# EAGLE board Main (EAGLE 5.10)
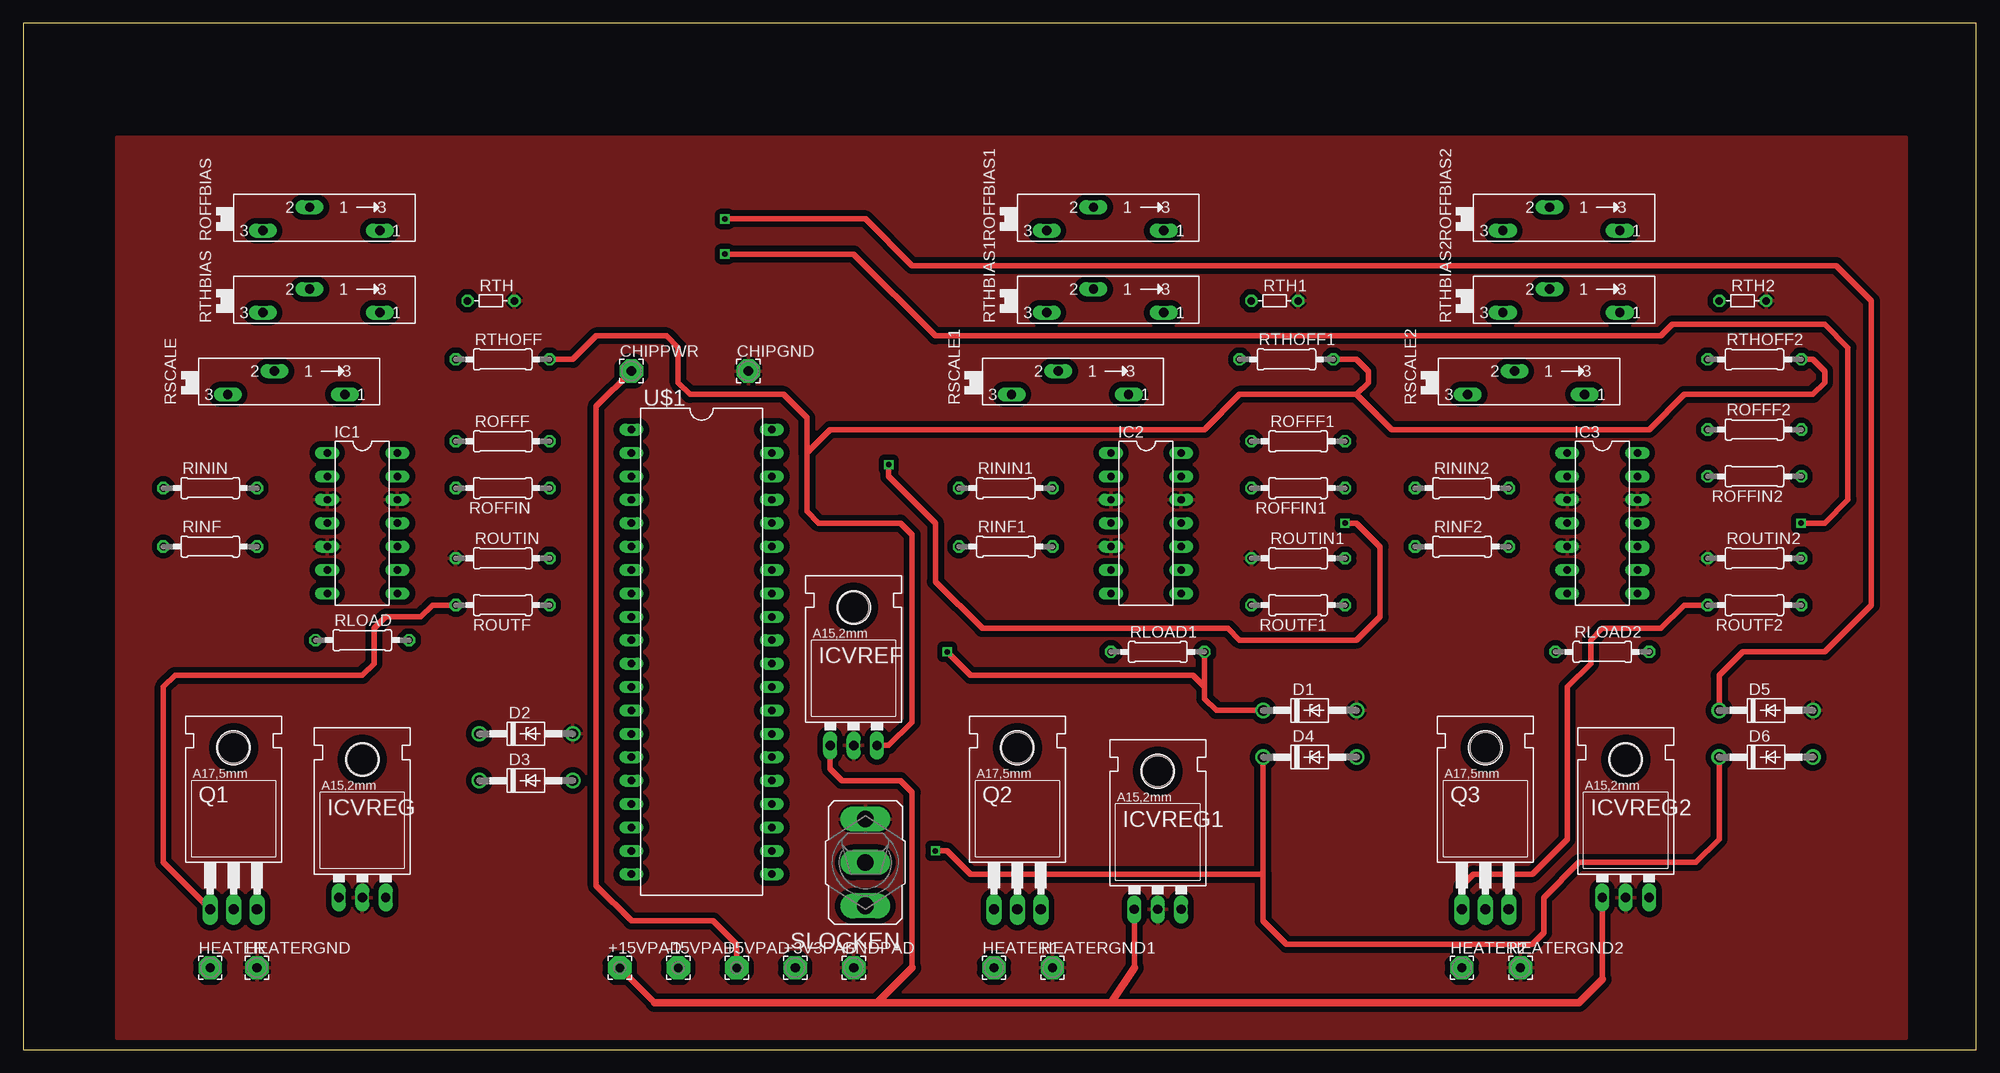
[diagram p0: board, top side]
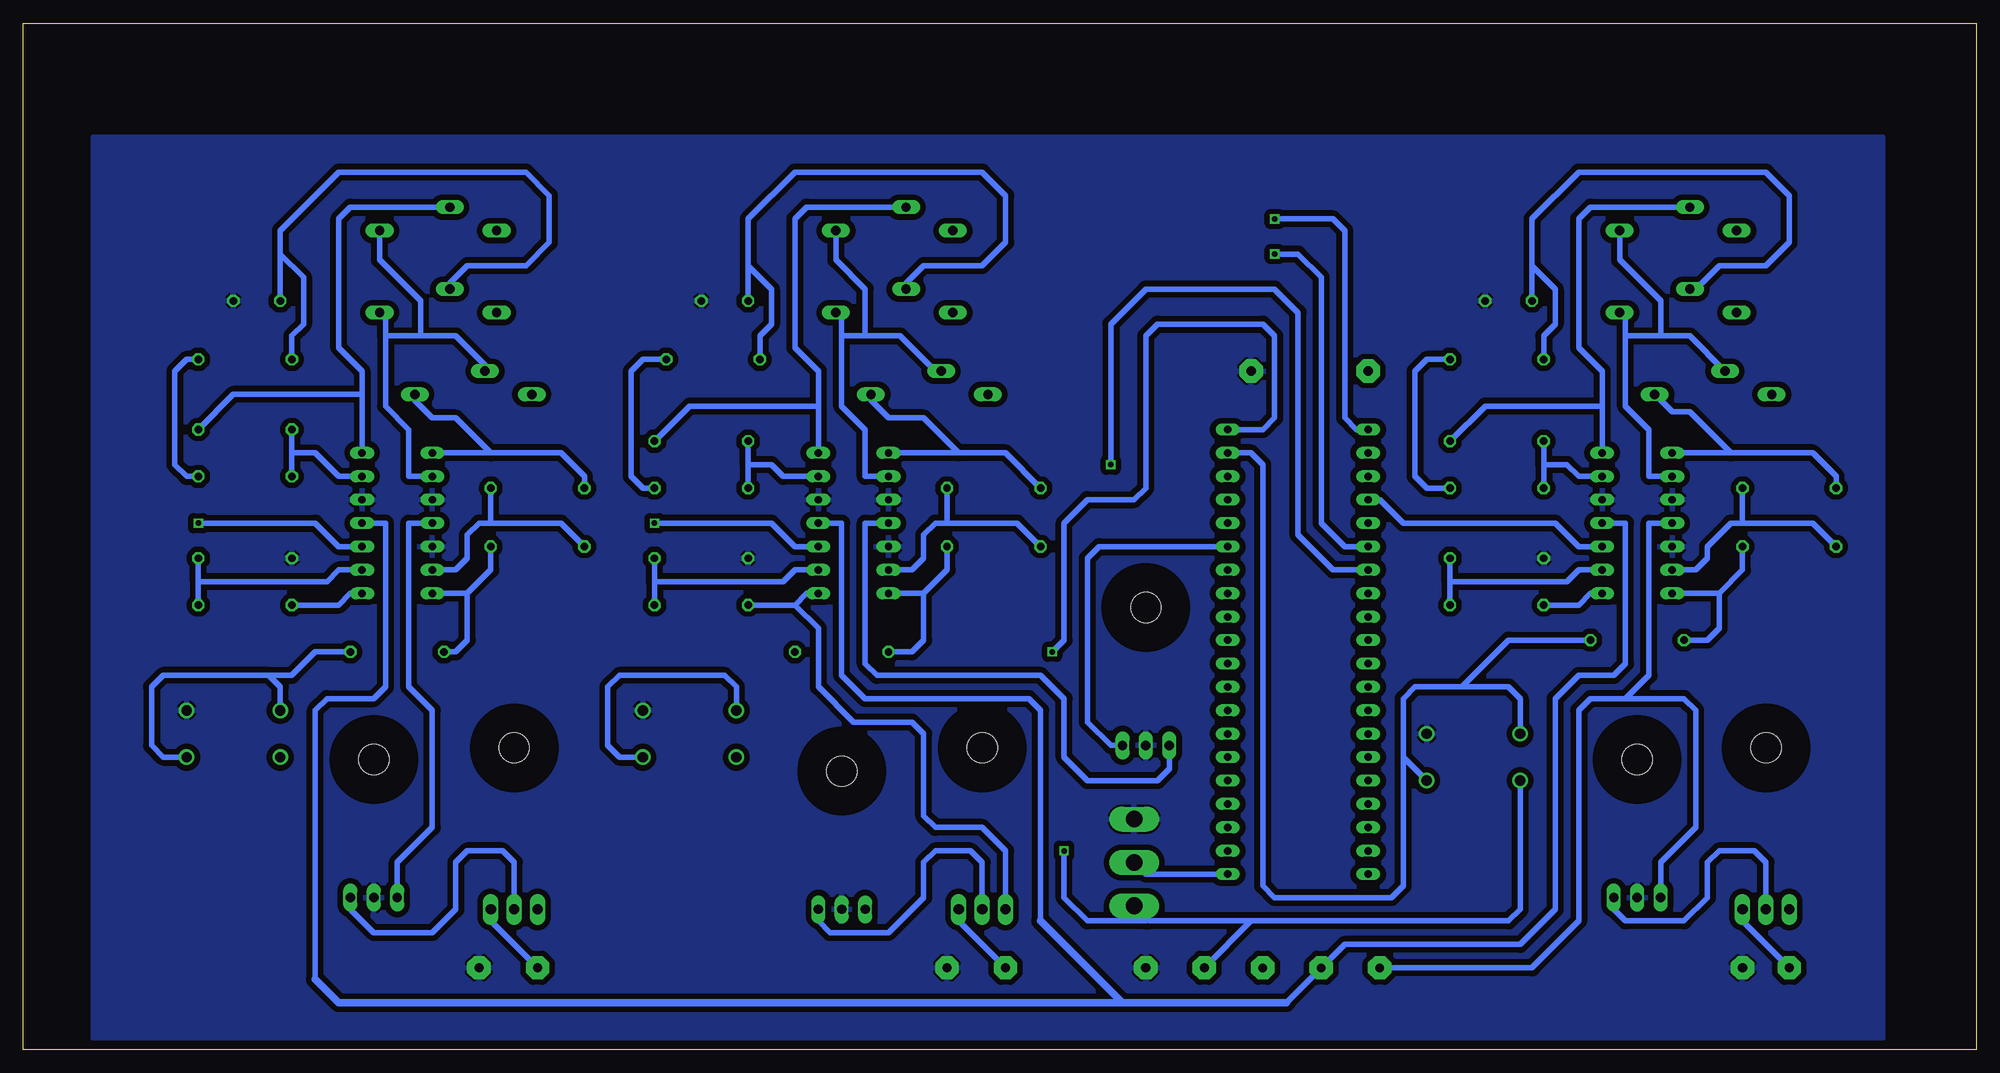
[diagram p1: board, bottom side, seen from below]

Size 212.07 x 111.43 mm. Coordinates in mm from the lower left corner, seen from the top.
Outline: 0,0 212.07,0 212.07,111.43 0,111.43 0,0
Copper layers (1*16): Top 0.035mm / dielectric 1.5mm / Bottom 0.035mm
Design rules "default *": minimum track width 10mil, minimum drill 24mil, track to track 8mil, track to pad 8mil, pad to pad 8mil, via to via 8mil, smd to smd 8mil, copper to edge 40mil, drill to drill 8mil, minimum pad ring 10mil, minimum via ring 8mil, stop-mask expansion 4mil, vias tented up to drill 0mil, thermal gap 10mil

## Footprints (pad centres in the part's own frame; a part is rotated, then mirrored left to right if it is on the bottom)
2,54/1,0 = drill 1.016 pad 2.54 octagon: 1 0,0
2,54/0,9 = drill 0.914 pad 2.54 octagon: 1 0,0
DO41Z10 = drill 1.118 round: A 5.08,0; C -5.08,0
DIL14 = drill 0.813 long: 1 -7.62,-3.81; 2 -5.08,-3.81; 3 -2.54,-3.81; 4 0,-3.81; 5 2.54,-3.81; 6 5.08,-3.81; 7 7.62,-3.81; 8 7.62,3.81; 9 5.08,3.81; 10 2.54,3.81; 11 0,3.81; 12 -2.54,3.81; 13 -5.08,3.81; 14 -7.62,3.81
78XXL = drill 1.016 long: GND 0,-3.81; IN -2.54,-3.81; OUT 2.54,-3.81 | hole 3.302: 0,11.176
TO220BH = drill 1.118 long: D 0,-6.35; G -2.54,-6.35; S 2.54,-6.35 | hole 3.302: 0,11.176
0207/10 = drill 0.813 octagon: 1 -5.08,0; 2 5.08,0
SP19L = drill 1.016 long: A 5.715,-1.27; E -6.985,-1.27; S -1.905,1.27
R-5 = drill 0.813 octagon: 1 -2.54,0; 2 2.54,0
M9040P = drill 1.803 long: 1 0,4.699; 2 0,0; 3 0,-4.699
DIL40 = drill 0.813 long: 1 -22.86,-8.89; 2 -20.32,-8.89; 3 -17.78,-8.89; 4 -15.24,-8.89; 5 -12.7,-8.89; 6 -10.16,-8.89; 7 -7.62,-8.89; 8 -5.08,-8.89; 9 -2.54,-8.89; 10 0,-8.89; 11 2.54,-8.89; 12 5.08,-8.89; 13 7.62,-8.89; 14 10.16,-8.89; 15 12.7,-8.89; 16 15.24,-8.89; 17 17.78,-8.89; 18 20.32,-8.89; 19 22.86,-8.89; 20 25.4,-8.89; 21 25.4,6.35; 22 22.86,6.35; 23 20.32,6.35; 24 17.78,6.35; 25 15.24,6.35; 26 12.7,6.35; 27 10.16,6.35; 28 7.62,6.35; 29 5.08,6.35; 30 2.54,6.35; 31 0,6.35; 32 -2.54,6.35; 33 -5.08,6.35; 34 -7.62,6.35; 35 -10.16,6.35; 36 -12.7,6.35; 37 -15.24,6.35; 38 -17.78,6.35; 39 -20.32,6.35; 40 -22.86,6.35

## Placement (x,y rotation side)
+3V3PAD  [2,54/1,0]  83.82,8.89 0 top
+5VPAD  [2,54/0,9]  77.47,8.89 0 top
+15VPAD  [2,54/0,9]  64.77,8.89 0 top
-15VPAD  [2,54/0,9]  71.12,8.89 0 top
CHIPGND  [2,54/1,0]  78.74,73.66 0 top
CHIPPWR  [2,54/1,0]  66.04,73.66 0 top
D1  1N4728  [DO41Z10]  139.7,36.83 0 top
D2  1N4728  [DO41Z10]  54.61,34.29 0 top
D3  1N4728  [DO41Z10]  54.61,29.21 0 top
D4  1N4728  [DO41Z10]  139.7,31.75 0 top
D5  1N4728  [DO41Z10]  189.23,36.83 0 top
D6  1N4728  [DO41Z10]  189.23,31.75 0 top
GNDPAD  [2,54/1,0]  90.17,8.89 0 top
HEATER  [2,54/1,0]  20.32,8.89 0 top
HEATER1  [2,54/1,0]  105.41,8.89 0 top
HEATER2  [2,54/1,0]  156.21,8.89 0 top
HEATERGND  [2,54/1,0]  25.4,8.89 0 top
HEATERGND1  [2,54/1,0]  111.76,8.89 0 top
HEATERGND2  [2,54/1,0]  162.56,8.89 0 top
IC1  LF347N  [DIL14]  36.83,57.15 270 top
IC2  LF347N  [DIL14]  121.92,57.15 270 top
IC3  LF347N  [DIL14]  171.45,57.15 270 top
ICVREF  [78XXL]  90.17,36.83 0 top
ICVREG  [78XXL]  36.83,20.32 0 top
ICVREG1  [78XXL]  123.19,19.05 0 top
ICVREG2  [78XXL]  173.99,20.32 0 top
Q1  IRFI540NPBF  [TO220BH]  22.86,21.59 0 top
Q2  IRFI540NPBF  [TO220BH]  107.95,21.59 0 top
Q3  IRFI540NPBF  [TO220BH]  158.75,21.59 0 top
RINF  [0207/10]  20.32,54.61 0 top
RINF1  [0207/10]  106.68,54.61 0 top
RINF2  [0207/10]  156.21,54.61 0 top
RININ  [0207/10]  20.32,60.96 0 top
RININ1  [0207/10]  106.68,60.96 0 top
RININ2  [0207/10]  156.21,60.96 0 top
RLOAD  [0207/10]  36.83,44.45 0 top
RLOAD1  [0207/10]  123.19,43.18 0 top
RLOAD2  [0207/10]  171.45,43.18 0 top
ROFFBIAS  [SP19L]  33.02,90.17 0 top
ROFFBIAS1  [SP19L]  118.11,90.17 0 top
ROFFBIAS2  [SP19L]  167.64,90.17 0 top
ROFFF  [0207/10]  52.07,66.04 0 top
ROFFF1  [0207/10]  138.43,66.04 0 top
ROFFF2  [0207/10]  187.96,67.31 0 top
ROFFIN  [0207/10]  52.07,60.96 180 top
ROFFIN1  [0207/10]  138.43,60.96 180 top
ROFFIN2  [0207/10]  187.96,62.23 180 top
ROUTF  [0207/10]  52.07,48.26 180 top
ROUTF1  [0207/10]  138.43,48.26 180 top
ROUTF2  [0207/10]  187.96,48.26 180 top
ROUTIN  [0207/10]  52.07,53.34 0 top
ROUTIN1  [0207/10]  138.43,53.34 0 top
ROUTIN2  [0207/10]  187.96,53.34 0 top
RSCALE  [SP19L]  29.21,72.39 0 top
RSCALE1  [SP19L]  114.3,72.39 0 top
RSCALE2  [SP19L]  163.83,72.39 0 top
RTH  THERMISTOR-5  [R-5]  50.8,81.28 0 top
RTH1  THERMISTOR-5  [R-5]  135.89,81.28 0 top
RTH2  THERMISTOR-5  [R-5]  186.69,81.28 0 top
RTHBIAS  [SP19L]  33.02,81.28 0 top
RTHBIAS1  [SP19L]  118.11,81.28 0 top
RTHBIAS2  [SP19L]  167.64,81.28 0 top
RTHOFF  [0207/10]  52.07,74.93 0 top
RTHOFF1  [0207/10]  137.16,74.93 0 top
RTHOFF2  [0207/10]  187.96,74.93 0 top
SLOCKEN  [M9040P]  91.44,20.32 180 top
U$1  ADUC7020  [DIL40]  74.93,44.45 270 top

## Library data of the parts
+3V3PAD +5VPAD +15VPAD -15VPAD CHIPGND CHIPPWR GNDPAD HEATER HEATER1 HEATER2 HEATERGND HEATERGND1 HEATERGND2 = wirepad
D1-D6 = diode
IC1-IC3 = linear
ICVREF ICVREG ICVREG1 ICVREG2 = v-reg
Q1-Q3 = transistor-power
RINF RINF1 RINF2 RININ RININ1 RININ2 RLOAD RLOAD1 RLOAD2 ROFFF ROFFF1 ROFFF2 ROFFIN ROFFIN1 ROFFIN2 ROUTF ROUTF1 ROUTF2 ROUTIN ROUTIN1 ROUTIN2 RTHOFF RTHOFF1 RTHOFF2 = resistor
ROFFBIAS ROFFBIAS1 ROFFBIAS2 RSCALE RSCALE1 RSCALE2 RTHBIAS RTHBIAS1 RTHBIAS2 = pot
RTH RTH1 RTH2 = varistor
SLOCKEN = switch
U$1 = John

## Nets
+3V3: +3V3PAD.1 D3.C D4.C D6.C SLOCKEN.1
+5V: +5VPAD.1 CHIPPWR.1
+15V: +15VPAD.1 IC1.4 IC2.4 IC3.4 ICVREF.IN ICVREG1.IN ICVREG2.IN ICVREG.IN
-15V: -15VPAD.1 IC1.11 IC2.11 IC3.11
AGND1: U$1.36
AVDD1: U$1.37
DGND1: U$1.17
GND: CHIPGND.1 D1.A D2.A D5.A GNDPAD.1 HEATERGND1.1 HEATERGND2.1 HEATERGND.1 IC1.3 IC1.5 IC1.12 IC2.3 IC2.5 IC2.12 IC3.3 IC3.5 IC3.12 ICVREF.GND ICVREG1.GND ICVREG2.GND ICVREG.GND ROUTIN1.1 ROUTIN2.1 ROUTIN.1 RTH1.2 RTH2.2 RTH.2 SLOCKEN.3
IOGND1: U$1.14
IOVDD1: U$1.15
N$1: IC1.6 RINF.1 RININ.2
N$2: D2.C D3.A RLOAD.2 U$1.39
N$3: IC1.1 RININ.1 RSCALE.A
N$4: HEATER.1 Q1.S
N$5: RTH.1 RTHBIAS.S RTHOFF.1
N$6: IC1.2 ROFFBIAS.A RSCALE.S RTHBIAS.A
N$7: SLOCKEN.2 U$1.21
N$8: IC1.10 U$1.4
N$9: IC1.9 ROUTF.1 ROUTIN.2
N$10: IC1.8 Q1.G ROUTF.2
N$11: IC1.14 ROFFBIAS.S ROFFF.2
N$12: IC1.13 ROFFF.1 ROFFIN.2
N$13: ICVREG.OUT Q1.D
N$15: IC1.7 RINF.2 RLOAD.1
N$18: RTH1.1 RTHBIAS1.S RTHOFF1.1
N$20: IC2.2 ROFFBIAS1.A RSCALE1.S RTHBIAS1.A
N$21: D1.C D4.A RLOAD1.2 U$1.40
N$22: IC2.6 RINF1.1 RININ1.2
N$23: IC2.1 RININ1.1 RSCALE1.A
N$24: IC2.14 ROFFBIAS1.S ROFFF1.2
N$25: IC2.13 ROFFF1.1 ROFFIN1.2
N$26: IC2.10 U$1.7
N$27: IC2.9 ROUTF1.1 ROUTIN1.2
N$28: IC2.8 Q2.G ROUTF1.2
N$29: HEATER1.1 Q2.S
N$30: IC2.7 RINF1.2 RLOAD1.1
N$32: ICVREG1.OUT Q2.D
N$33: RTH2.1 RTHBIAS2.S RTHOFF2.1
N$34: IC3.2 ROFFBIAS2.A RSCALE2.S RTHBIAS2.A
N$35: D5.C D6.A RLOAD2.2 U$1.1
N$36: IC3.6 RINF2.1 RININ2.2
N$37: IC3.1 RININ2.1 RSCALE2.A
N$38: IC3.14 ROFFBIAS2.S ROFFF2.2
N$39: IC3.13 ROFFF2.1 ROFFIN2.2
N$40: IC3.10 U$1.6
N$41: IC3.9 ROUTF2.1 ROUTIN2.2
N$42: IC3.8 Q3.G ROUTF2.2
N$43: HEATER2.1 Q3.S
N$44: IC3.7 RINF2.2 RLOAD2.1
N$45: ICVREF.OUT ROFFIN1.1 ROFFIN2.1 ROFFIN.1 RTHOFF1.2 RTHOFF2.2 RTHOFF.2 U$1.35
N$46: ICVREG2.OUT Q3.D

## Tracks (layer width: path | path; a pad name or v marks a point on that pad's centre or on a via)
+3V3  (1 unrouted)
  Top 0.61: D6.C 184.15,22.86 181.61,20.32 168.91,20.32 165.1,16.51 165.1,12.7 163.83,11.43 137.16,11.43 134.62,13.97 134.62,19.05 | 134.62,19.05 D4.C | 134.62,19.05 102.87,19.05 100.33,21.59 99.06,21.59
  Bottom 0.61: D3.C 49.53,15.24 50.8,13.97 78.74,13.97 | 78.74,13.97 +3V3PAD.1 | 78.74,13.97 89.79,13.97 SLOCKEN.1 91.44,15.24 90.17,13.97 96.52,13.97 99.06,16.51 99.06,21.59
+5V
  Top 0.61: +5VPAD.1 77.47,11.43 74.93,13.97 66.04,13.97 62.23,17.78 62.23,69.85 CHIPPWR.1
+15V
  Top 0.61: +15VPAD.1 68.58,5.08 | 96.52,8.89 96.52,27.94 95.25,29.21 88.9,29.21 87.63,30.48 ICVREF.IN | 120.65,8.89 ICVREG1.IN | 171.45,7.62 ICVREG2.IN
  Top 0.813: 68.58,5.08 92.71,5.08 | 92.71,5.08 96.52,8.89 | 118.11,5.08 120.65,8.89 | 92.71,5.08 118.11,5.08 | 171.45,7.62 168.91,5.08 118.11,5.08
  Bottom 0.61: IC1.4 35.56,57.15 35.56,40.64 38.1,38.1 | 38.1,38.1 41.91,38.1 43.18,36.83 43.18,13.97 48.26,8.89 +15VPAD.1 | ICVREG.IN 34.29,20.32 30.48,24.13 30.48,36.83 31.75,38.1 38.1,38.1 | IC2.4 120.65,57.15 120.65,41.91 119.38,40.64 101.6,40.64 99.06,38.1 99.06,31.75 96.52,29.21 88.9,29.21 87.63,30.48 ICVREF.IN | IC3.4 170.18,57.15 170.18,39.37 167.64,36.83 167.64,24.13 171.45,20.32 ICVREG2.IN
-15V
  Bottom 0.61: IC1.11 38.1,57.15 38.1,41.91 39.37,40.64 43.18,40.64 45.72,38.1 45.72,15.24 49.53,11.43 68.58,11.43 -15VPAD.1 74.93,5.08 | IC2.11 123.19,57.15 123.19,40.64 120.65,38.1 102.87,38.1 101.6,36.83 101.6,13.97 | IC3.11 172.72,57.15 172.72,39.37 173.99,38.1 179.07,38.1 180.34,36.83 180.34,7.62
  Bottom 0.813: 92.71,5.08 101.6,13.97 | 74.93,5.08 92.71,5.08 | 180.34,7.62 177.8,5.08 92.71,5.08
GND
  pour Bottom (isolate 0.61, rank 2): 10.16,1.27 204.47,1.27 204.47,99.06 10.16,99.06
  pour Top (isolate 0.61): 10.16,1.27 204.47,1.27 204.47,99.06 10.16,99.06
N$1
  Bottom 0.61: 25.4,57.15 17.78,57.15 RINF.1 | 25.4,57.15 RININ.2 | 25.4,57.15 26.67,57.15 29.21,54.61 29.21,53.34 30.48,52.07 IC1.6
N$2
  Bottom 0.61: D2.C 49.53,38.1 50.8,39.37 55.88,39.37 | 62.23,31.75 D3.A | 62.23,31.75 62.23,38.1 60.96,39.37 55.88,39.37 | 55.88,39.37 50.8,44.45 RLOAD.2 | 62.23,31.75 62.23,17.78 63.5,16.51 76.2,16.51 77.47,17.78 77.47,63.5 78.74,64.77 U$1.39
N$3
  Bottom 0.61: RSCALE.A 33.02,69.22 31.11,69.22 26.67,64.77 | 26.67,64.77 17.78,64.77 15.24,62.23 RININ.1 | 26.67,64.77 IC1.1
N$4
  Bottom 0.61: Q1.S 25.4,13.97 HEATER.1
N$5
  Bottom 0.61: RTHBIAS.S 30.48,82.55 27.94,85.09 22.86,85.09 20.32,87.63 20.32,92.71 22.86,95.25 43.18,95.25 48.26,90.17 48.26,85.09 | 48.26,85.09 RTH.1 | RTHOFF.1 46.99,77.47 45.72,78.74 45.72,82.55 48.26,85.09
N$6
  Bottom 0.61: IC1.2 35.56,62.23 35.56,67.31 38.1,69.85 38.1,77.47 | 38.1,77.47 38.1,79.38 RTHBIAS.A | ROFFBIAS.A 38.73,85.72 34.29,81.28 34.29,77.47 | 38.1,77.47 34.29,77.47 | 34.29,77.47 31.11,77.47 RSCALE.S
N$7
  Bottom 0.61: U$1.21 90.17,19.05 SLOCKEN.2
N$8
  Bottom 0.61: IC1.10 43.18,54.61 45.72,57.15 62.23,57.15 64.77,59.69 U$1.4
N$9
  Bottom 0.61: 57.15,50.8 ROUTF.1 | 57.15,50.8 ROUTIN.2 | IC1.9 43.18,52.07 44.45,50.8 57.15,50.8
N$10
  Top 0.61: Q1.G 15.24,20.32 15.24,39.37 16.51,40.64 36.83,40.64 38.1,41.91 38.1,45.72 39.37,46.99 43.18,46.99 44.45,48.26 ROUTF.2
  Bottom 0.61: IC1.8 41.91,49.53 43.18,48.26 ROUTF.2
N$11
  Bottom 0.61: 40.64,69.85 40.64,73.66 43.18,76.2 43.18,90.17 41.91,91.44 ROFFBIAS.S | IC1.14 40.64,69.85 | 40.64,69.85 53.34,69.85 ROFFF.2
N$12
  Bottom 0.61: 46.99,63.5 ROFFIN.2 | 46.99,63.5 ROFFF.1 | IC1.13 43.18,62.23 44.45,63.5 46.99,63.5
N$13
  Bottom 0.61: Q1.D 22.86,20.32 24.13,21.59 27.94,21.59 29.21,20.32 29.21,16.51 31.75,13.97 38.1,13.97 39.37,15.24 ICVREG.OUT
N$14  (via drill 0.6)
  other vias: 193.04,57.15
N$15
  Bottom 0.61: RINF.2 25.4,52.07 27.94,49.53 | 27.94,49.53 IC1.7 | RLOAD.1 29.21,44.45 27.94,45.72 27.94,49.53
N$16  (via drill 0.6)
  other vias: 99.06,21.59
N$17  (via drill 0.6)
  other vias: 143.51,57.15
N$18
  Bottom 0.61: RTHOFF1.1 132.08,77.47 130.81,78.74 130.81,82.55 133.35,85.09 | 133.35,85.09 RTH1.1 | RTHBIAS1.S 116.2,83.19 114.3,85.09 107.95,85.09 105.41,87.63 105.41,92.71 107.95,95.25 128.27,95.25 133.35,90.17 133.35,85.09
N$19  (via drill 0.6)
  other vias: 76.2,90.17
N$20
  Bottom 0.61: IC2.2 120.65,62.23 120.65,67.31 123.19,69.85 123.19,77.47 | 123.19,77.47 123.19,79.38 RTHBIAS1.A | RSCALE1.S 113.03,73.66 116.84,77.47 120.65,77.47 | 123.19,77.47 120.65,77.47 | ROFFBIAS1.A 123.83,85.72 120.65,82.55 120.65,77.47
N$21  (via drill 0.6)
  Top 0.61: D1.C 129.54,36.83 128.27,38.1 RLOAD1.2 128.27,39.37 127,40.64 102.87,40.64 v100.33,43.18
  Bottom 0.61: U$1.40 77.47,67.31 76.2,68.58 76.2,77.47 77.47,78.74 88.9,78.74 90.17,77.47 90.17,60.96 91.44,59.69 96.52,59.69 99.06,57.15 99.06,44.45 v100.33,43.18 | D1.C 134.62,39.37 135.89,40.64 147.32,40.64 148.59,39.37 148.59,33.02 147.32,31.75 D4.A
N$22
  Bottom 0.61: RINF1.1 104.14,57.15 111.76,57.15 | IC2.6 115.57,52.07 114.3,53.34 114.3,55.88 113.03,57.15 111.76,57.15 | 111.76,57.15 RININ1.2
N$23
  Bottom 0.61: RININ1.1 105.41,64.77 110.49,64.77 | 110.49,64.77 IC2.1 | RSCALE1.A 120.02,70.48 118.11,68.58 114.3,68.58 110.49,64.77
N$24
  Bottom 0.61: ROFFBIAS1.S 127,91.44 128.27,90.17 128.27,76.2 125.73,73.66 125.73,69.85 | IC2.14 125.73,69.85 | ROFFF1.2 139.7,69.85 125.73,69.85
N$25
  Bottom 0.61: 133.35,63.5 ROFFIN1.2 | 133.35,63.5 ROFFF1.1 | IC2.13 129.54,62.23 130.81,63.5 133.35,63.5
N$26  (via drill 0.6)  (1 unrouted)
  Top 0.61: v93.98,63.5 93.98,62.23 99.06,57.15 99.06,50.8 104.14,45.72 130.81,45.72 132.08,44.45 144.78,44.45 147.32,46.99 147.32,54.61 144.78,57.15 143.51,57.15
  Bottom 0.61: U$1.7 69.85,52.07 73.66,55.88 73.66,80.01 76.2,82.55 90.17,82.55 93.98,78.74 v93.98,63.5 | IC2.10 128.27,54.61 130.81,57.15 143.51,57.15
N$27
  Bottom 0.61: 143.51,50.8 ROUTF1.1 | 143.51,50.8 ROUTIN1.2 | IC2.9 128.27,52.07 129.54,50.8 143.51,50.8
N$28
  Bottom 0.61: IC2.8 127,49.53 128.27,48.26 | 128.27,48.26 ROUTF1.2 | 128.27,48.26 125.73,45.72 125.73,39.37 121.92,35.56 115.57,35.56 114.3,34.29 114.3,25.4 113.03,24.13 107.95,24.13 105.41,21.59 Q2.G
N$29
  Bottom 0.61: Q2.S 110.49,13.97 HEATER1.1
N$30
  Bottom 0.61: 114.3,49.53 IC2.7 | 114.3,49.53 111.76,52.07 RINF1.2 | RLOAD1.1 115.57,43.18 114.3,44.45 114.3,49.53
N$31  (via drill 0.6)
  other vias: 76.2,86.36
N$32
  Bottom 0.61: Q2.D 107.95,20.32 109.22,21.59 113.03,21.59 114.3,20.32 114.3,16.51 118.11,12.7 124.46,12.7 125.73,13.97 ICVREG1.OUT
N$33
  Bottom 0.61: RTHBIAS2.S 165.73,83.19 163.83,85.09 157.48,85.09 154.94,87.63 154.94,92.71 157.48,95.25 177.8,95.25 184.15,88.9 184.15,86.36 | 184.15,86.36 RTH2.1 | RTHOFF2.1 182.88,77.47 181.61,78.74 181.61,83.82 184.15,86.36
N$34
  Bottom 0.61: RSCALE2.S 161.92,74.3 165.1,77.47 168.91,77.47 | 172.72,77.47 168.91,77.47 | 172.72,77.47 172.72,79.38 RTHBIAS2.A | ROFFBIAS2.A 173.35,85.72 168.91,81.28 168.91,77.47 | IC3.2 170.18,62.23 170.18,67.31 172.72,69.85 172.72,77.47
N$35  (1 unrouted)
  Top 0.61: D5.C 184.15,40.64 186.69,43.18 195.58,43.18 200.66,48.26 200.66,81.28 196.85,85.09 96.52,85.09 91.44,90.17 76.2,90.17
  Bottom 0.61: U$1.1 67.31,67.31 68.58,68.58 68.58,88.9 69.85,90.17 76.2,90.17 | D6.A 196.85,31.75 198.12,33.02 198.12,39.37 196.85,40.64 185.42,40.64 | 185.42,40.64 184.15,39.37 D5.C | RLOAD2.2 180.34,43.18 182.88,40.64 185.42,40.64
N$36
  Bottom 0.61: IC3.6 165.1,52.07 163.83,53.34 163.83,55.88 162.56,57.15 161.29,57.15 | 161.29,57.15 153.67,57.15 RINF2.1 | 161.29,57.15 RININ2.2
N$37
  Bottom 0.61: 161.29,64.77 153.67,64.77 151.13,62.23 RININ2.1 | 161.29,64.77 IC3.1 | RSCALE2.A 169.54,70.48 167.64,68.58 165.1,68.58 161.29,64.77
N$38
  Bottom 0.61: ROFFBIAS2.S 176.53,91.44 177.8,90.17 177.8,76.2 175.26,73.66 175.26,71.12 | 175.26,71.12 IC3.14 | ROFFF2.2 189.23,71.12 175.26,71.12
N$39
  Bottom 0.61: ROFFF2.1 182.88,64.77 | 182.88,64.77 ROFFIN2.2 | IC3.13 177.8,62.23 180.34,64.77 182.88,64.77
N$40  (2 unrouted)
  Top 0.61: 76.2,86.36 90.17,86.36 99.06,77.47 177.8,77.47 179.07,78.74 195.58,78.74 198.12,76.2 198.12,59.69 195.58,57.15 193.04,57.15
  Bottom 0.61: U$1.6 68.58,54.61 71.12,57.15 71.12,83.82 73.66,86.36 76.2,86.36 | IC3.10 177.8,54.61 180.34,57.15 193.04,57.15
N$41
  Bottom 0.61: 193.04,50.8 ROUTF2.1 | 193.04,50.8 ROUTIN2.2 | IC3.9 177.8,52.07 179.07,50.8 193.04,50.8
N$42
  Top 0.61: Q3.G 156.21,17.78 157.48,19.05 163.83,19.05 167.64,22.86 167.64,39.37 170.18,41.91 170.18,44.45 171.45,45.72 177.8,45.72 180.34,48.26 ROUTF2.2
  Bottom 0.61: ROUTF2.2 177.8,48.26 176.53,49.53 IC3.8
N$43
  Bottom 0.61: HEATER2.1 161.29,13.97 Q3.S
N$44
  Bottom 0.61: RINF2.2 161.29,52.07 163.83,49.53 | 163.83,49.53 IC3.7 | RLOAD2.1 165.1,43.18 163.83,44.45 163.83,49.53
N$45
  Top 0.61: ICVREF.OUT 93.98,33.02 96.52,35.56 96.52,55.88 95.25,57.15 86.36,57.15 85.09,58.42 85.09,64.77 | 85.09,64.77 85.09,68.58 82.55,71.12 72.39,71.12 71.12,72.39 71.12,76.2 69.85,77.47 62.23,77.47 59.69,74.93 RTHOFF.2 | 85.09,64.77 87.63,67.31 128.27,67.31 132.08,71.12 144.78,71.12 | RTHOFF1.2 144.78,74.93 146.05,73.66 146.05,72.39 144.78,71.12 | 144.78,71.12 148.59,67.31 176.53,67.31 180.34,71.12 194.31,71.12 195.58,72.39 195.58,73.66 194.31,74.93 RTHOFF2.2
  Bottom 0.61: ROFFIN.1 59.69,60.96 60.96,62.23 60.96,73.66 59.69,74.93 RTHOFF.2 | U$1.35 95.25,54.61 96.52,53.34 96.52,35.56 93.98,33.02 ICVREF.OUT | RTHOFF1.2 144.78,74.93 146.05,73.66 146.05,62.23 144.78,60.96 ROFFIN1.1 | ROFFIN2.1 194.31,62.23 195.58,63.5 195.58,73.66 194.31,74.93 RTHOFF2.2
N$46
  Bottom 0.61: Q3.D 158.75,20.32 160.02,21.59 163.83,21.59 165.1,20.32 165.1,15.24 167.64,12.7 173.99,12.7 176.53,15.24 ICVREG2.OUT